# Altium PCB Mirror_PCB1.PcbDoc (part 2 of 2)
Units mm, origin at the board's own origin, x right, y up, seen from the top; angles counter-clockwise.
Board outline 98.5 x 98 mm, 2 copper layers (Top Layer, Bottom Layer), stack 0.187 mm thick; 46 components, 20 nets, 175 pads, 239 vias.
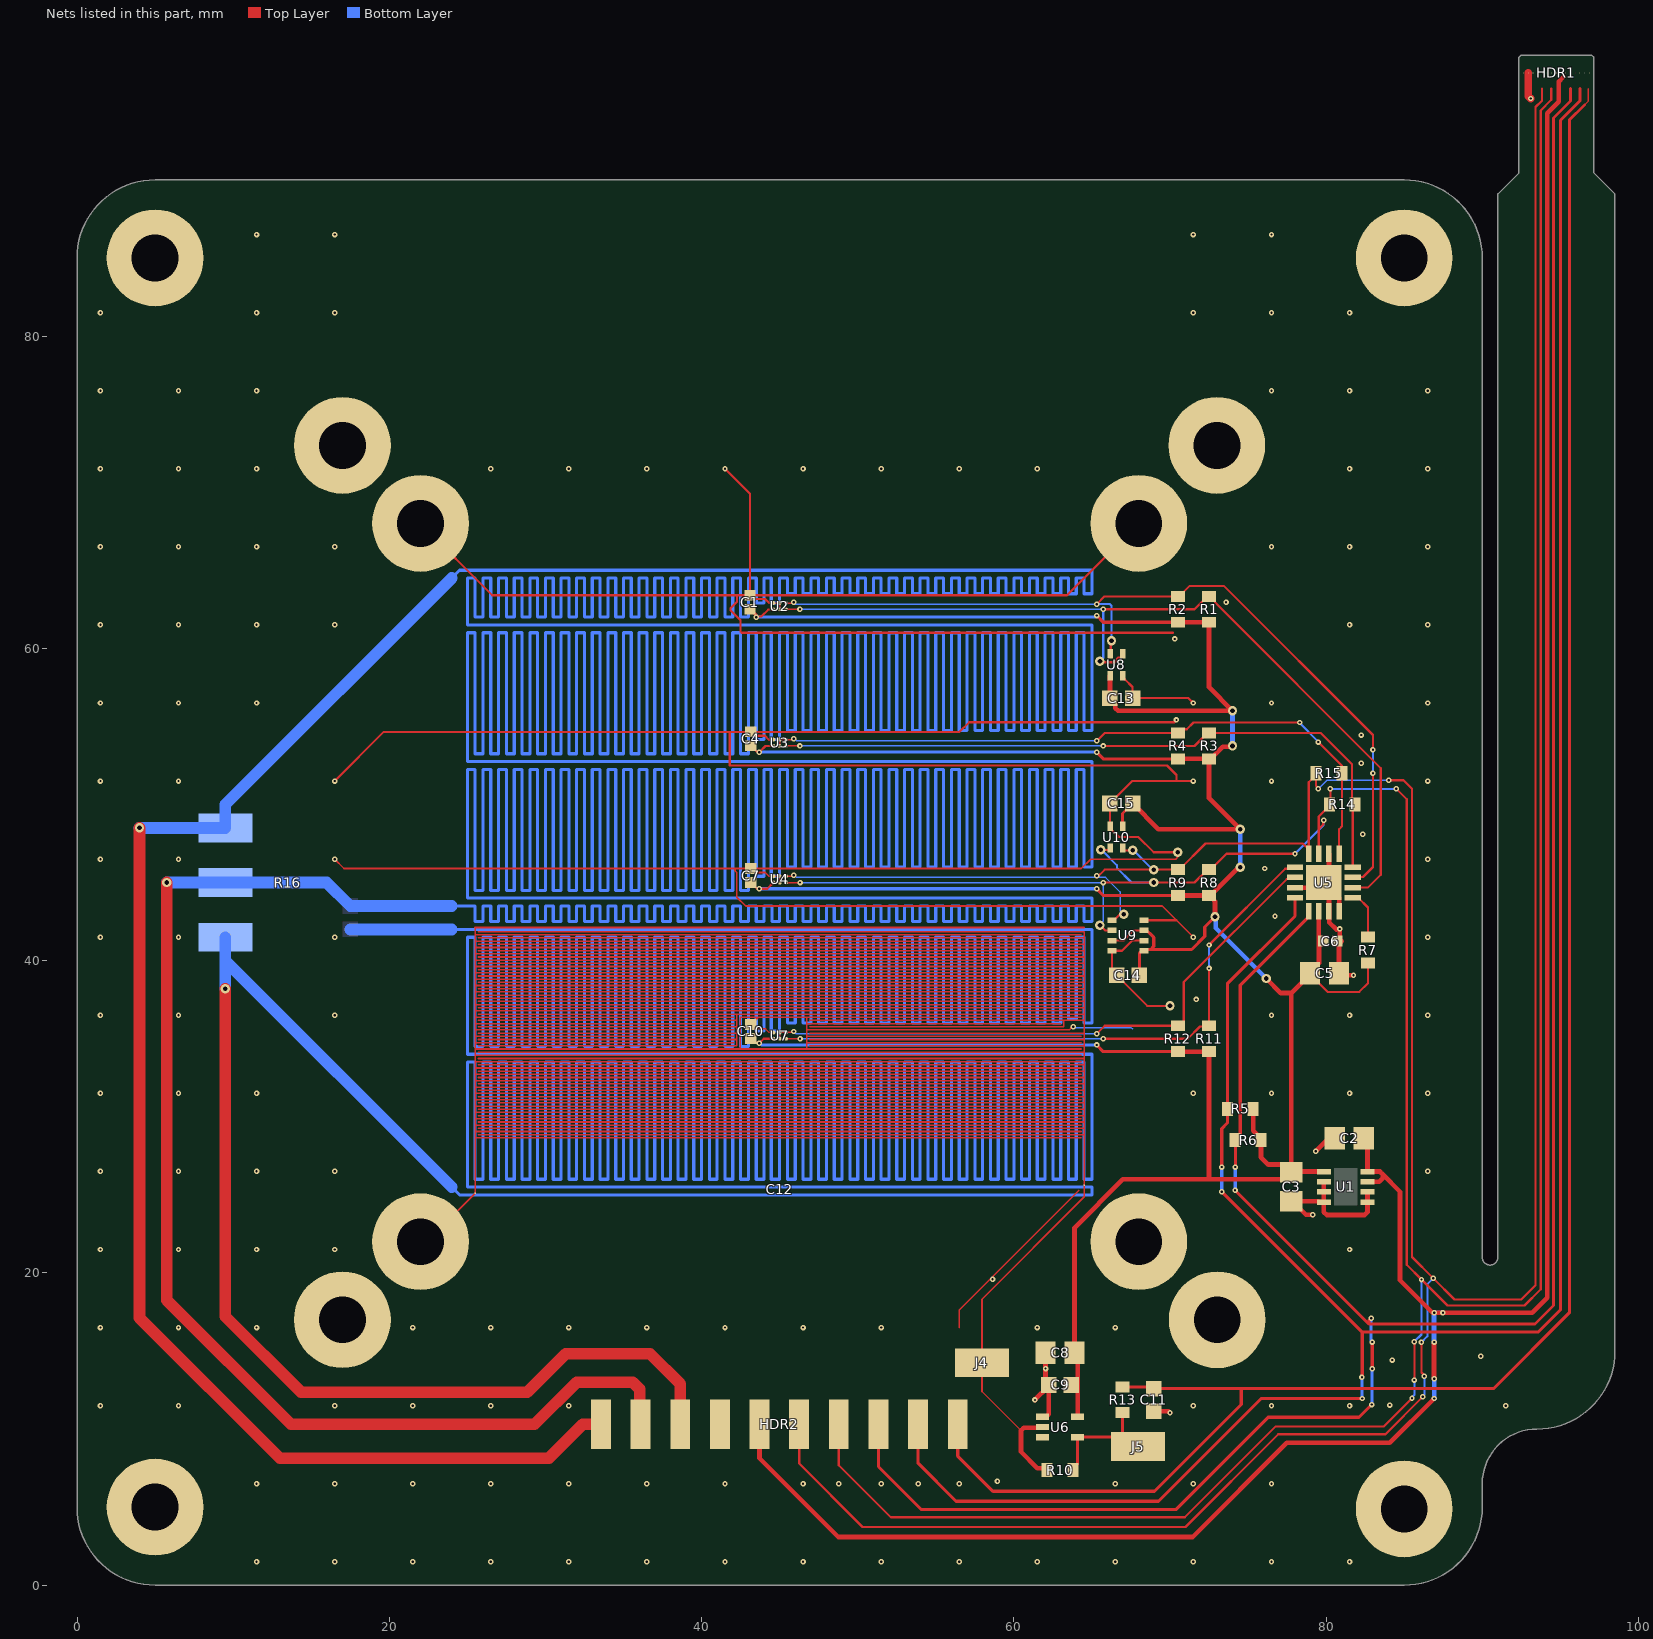
[diagram p2: the nets of this part, all layers, seen from the top]

## Part data
C1 C4 C6 C7 C10: library part CC0402KRX7R9BB103, "CAP 10nF SM0402 X7R 50V YAGEO CC2", Manufacturer=Yageo, Manufacturer Part Number=CC0603KRX7R9BB103, Package=0603, Supplier Part Number 1=3369167, Tolerance (%)=10, Voltage Rating (Volts)=50, Category=Capacitor, ComponentLink1Description="Manufacturer Website", ComponentLink1URL=http://www.yageo.com, Supplier 1=Farnell, Supplier 2=Mouser, Supplier 3=DigiKey, Supplier Part Number 2=603-CC402KRX7R9BB103, Supplier Part Number 3=311-1349-1-ND
C2 C3 C5 C8: library part CC0805KKX7R8BB105, "CAP 1uF SM0805 X7R 25V YAGEO CC2", Manufacturer=Yageo, Package=0805, Supplier Part Number 1=1458903, Tolerance (%)=10, Voltage Rating (Volts)=25, Category=Capacitor, ComponentLink1Description="Manufacturer Website", ComponentLink1URL=http://www.yageo.com, Manufacturer Part Number=CC0805KKX7R8BB105, Supplier 1=Farnell, Supplier 2=Digikey, Supplier 3=Mouser, Supplier 4="Future Electronics", Supplier 5="Arrow Electronics", Supplier 6=Rs, Supplier 7=Digikey, Supplier Part Number 2=311-1456-1-ND, Supplier Part Number 3=603-CC805KKX7R8BB105, Supplier Part Number 4=7716954, Supplier Part Number 5=CC0805KKX7R8BB105, Supplier Part Number 6=1988104, Supplier Part Number 7=311-1456-6-ND
C9 C11: library part CC0603KRX7R9BB103, "CAP 10nF SM0603 X7R 50V YAGEO CC2", Manufacturer=Yageo, Package=0603, Supplier Part Number 1=722236, Tolerance (%)=10, Voltage Rating (Volts)=50, Category=Capacitor, ComponentLink1Description="Manufacturer Website", ComponentLink1URL=http://www.yageo.com, Manufacturer Part Number=CC0603KRX7R9BB103, Supplier 1=Farnell, Supplier 2=DigiKey, Supplier 3="Future Electronics", Supplier 4="Arrow Electronics", Supplier 5=Rs, Supplier 6=Digikey, Supplier 7=Digikey, Supplier 8=Mouser, Supplier Part Number 2=311-1085-1-ND, Supplier Part Number 3=4131256, Supplier Part Number 4=CC0603KRX7R9BB103, Supplier Part Number 5=6169537, Supplier Part Number 6=311-1085-1-ND, Supplier Part Number 7=311-1085-6-ND, Supplier Part Number 8=603-CC603KRX7R9BB103
C13 C14 C15: library part CC0603KRX7R9BB104, "CAP 100nF SM0603 X7R 50V YAGEO CC2", Manufacturer=Yageo, Package=0603, Supplier Part Number 1=603-CC603KRX7R9BB104, Tolerance (%)=10, Voltage Rating (Volts)=50, Category=Capacitor, ComponentLink1Description="Manufacturer Website", ComponentLink1URL=http://www.yageo.com, Manufacturer Part Number=CC0603KRX7R9BB104, Supplier 1=Mouser, Supplier 2="Future Electronics", Supplier 3="Future Electronics", Supplier 4="Arrow Electronics", Supplier 5=Rs, Supplier 6=Avnet, Supplier 7=Digikey, Supplier 8=Digikey, Supplier Part Number 2=3035896, Supplier Part Number 3=9017302, Supplier Part Number 4=CC0603KRX7R9BB104, Supplier Part Number 5=6698767, Supplier Part Number 6=68R4788, Supplier Part Number 7=311-1344-1-ND, Supplier Part Number 8=311-1344-6-ND
HDR1: library part FPC_Contacts_15_DualRow
HDR2: "SURFACE MOUNT (2.54 mm) .100\" PITCH .025\" SQ POST HEADER", Supplier Part Number 1=200-TSM12001TSH, Supplier 1=Mouser, Supplier 2=Digikey, Supplier Part Number 2=TSM-120-01-T-SH-ND
J4 J5: "S1751-46 SMT TestPoint 3.25x1.65", Supplier Part Number 1=1613604, Supplier 1=Rs, Supplier 2=Rs, Supplier 3=Digikey, Supplier 4=Mouser, Supplier Part Number 2=1613705, Supplier Part Number 3=952-3024-ND, Supplier Part Number 4=855-S1751-46
R1 R2 R3 R4 R5 R6 R8 R9 R11 R12: library part RC0603FR-073K3L, "RES 3K3 SM0603 YAGEO RC_L", Manufacturer=Yageo, Manufacturer Part Number=RC0603FR-0710KL, Package=0603, Power (Watts)=0.1, Resistance (Ohms)=10000, Supplier Part Number 1=1995564, Tolerance (%)=1, Category=Resistor, ComponentLink1Description="Manufacturer Website", ComponentLink1URL=http://www.yageo.com, Supplier 1=Rs, Supplier 2=Farnell, Supplier 3=Digikey, Supplier 4=Digikey, Supplier 5=Mouser, Supplier 6=Newark, Supplier Part Number 2=9238549, Supplier Part Number 3=311-3.30KHRCT-ND, Supplier Part Number 4=311-3.30KHRDKR-ND, Supplier Part Number 5=603-RC0603FR-073K3L, Supplier Part Number 6=98K7393
R7 R10 R13: library part RC0603FR-0710KL, "RES 10K SM0603 YAGEO RC_L", Manufacturer=Yageo, Package=0603, Power (Watts)=0.1, Resistance (Ohms)=10000, Supplier Part Number 1=9238603, Tolerance (%)=1, Category=Resistor, ComponentLink1Description="Manufacturer Website", ComponentLink1URL=http://www.yageo.com, Manufacturer Part Number=RC0603FR-0710KL, Supplier 1=Farnell, Supplier 2="Future Electronics", Supplier 3=Rs, Supplier 4=Digikey, Supplier 5=Digikey, Supplier 6=Mouser, Supplier 7=Newark, Supplier Part Number 2=3349388, Supplier Part Number 3=1995443, Supplier Part Number 4=311-10.0KHRCT-ND, Supplier Part Number 5=311-10.0KHRDKR-ND, Supplier Part Number 6=603-RC0603FR-0710KL, Supplier Part Number 7=98K7338
R14 R15: library part RC0603FR-070RL, "RES 0R SM0603 YAGEO RC_L", Manufacturer=Yageo, Manufacturer Part Number=RC0603FR-0710KL, Package=0603, Power (Watts)=0.1, Resistance (Ohms)=10000, Supplier Part Number 1=311-0.0HRCT-ND, Tolerance (%)=1, Category=Resistor, ComponentLink1Description="Manufacturer Website", ComponentLink1URL=http://www.yageo.com, Supplier 1=Digikey, Supplier 2=Digikey, Supplier 3=Farnell, Supplier 4=Mouser, Supplier 5=Newark, Supplier Part Number 2=311-0.0HRDKR-ND, Supplier Part Number 3=2309106, Supplier Part Number 4=603-RC0603FR-070RL, Supplier Part Number 5=50Y7761
U1: library part TPS78433QWDRBRQ1, "TPS78433-Q1 3.3V, 300-mA, High-PSRR Low-Dropout Voltage Regulator With High Accuracy and Enable,  8-SON (3x3)", Supplier Part Number 1=595-TPS78433QWDRBRQ1, Supplier 1=Mouser, Supplier 2=Digikey, Supplier 3="Texas Instruments", Supplier 4=Digikey, Supplier 5=Digikey, Supplier 6=LCSC, Supplier Part Number 2=296-TPS78433QWDRBRQ1CT-ND, Supplier Part Number 3=TPS78433QWDRBRQ1, Supplier Part Number 4=296-TPS78433QWDRBRQ1DKR-ND, Supplier Part Number 5=296-TPS78433QWDRBRQ1TR-ND, Supplier Part Number 6=C3747465
U2 U3 U4 U7: library part AS6221-AWLT-S, "AS6221 Temperature Sensor Digital -40°C ~ 125°C 16b 6-WLCSP (1.5x1.03)", Supplier Part Number 1=985-AS6221-AWLT-S, Supplier 1=Mouser, Supplier 2=Digikey, Supplier 3="Arrow Electronics", Supplier 4="Future Electronics", Supplier 5=Digikey, Supplier 6=Digikey, Supplier 7=Avnet, Supplier Part Number 2=4991-AS6221-AWLT-SCT-ND, Supplier Part Number 3=AS6221-AWLT-S, Supplier Part Number 4=1136541, Supplier Part Number 5=4991-AS6221-AWLT-SDKR-ND, Supplier Part Number 6=4991-AS6221-AWLT-STR-ND, Supplier Part Number 7=Q65114A1149
U5: "4-Channel I2C And SMBus Switch With Reset Functions", Manufacturer_Name="Texas Instruments", Mouser Part Number=595-PCA9546ARGVR, Datasheet Link=http://www.ti.com/lit/gpn/pca9546a, Geometry.Height=1mm, Manufacturer_Part_Number=PCA9546ARGVR, Mouser Price/Stock=https://www.mouser.co.uk/ProductDetail/Texas-Instruments/PCA9546ARGVR?qs=iSMark9AYDVOIxSBd0ujBA%3D%3D, Supplier 1=Mouser, Supplier 2=Digi-Key, Supplier 3=Digi-Key, Supplier Part Number 1=595-PCA9546ARGVR, Supplier Part Number 2=296-21771-1-ND, Supplier Part Number 3=296-21771-6-ND
U6: "SN74LVC1G14 Single Schmitt-Trigger Inverter 1.65-V to 5.5-V VCC +-24mA Output Current (DBV, DCK, DRL, DRY, DPW, and YZP Package)", Supplier Part Number 1=595-SN74LVC1G14DCKR, Supplier 1=Mouser, Supplier 2=Digikey, Supplier 3=Digikey, Supplier 4=LCSC, Supplier Part Number 2=296-11608-1-ND, Supplier Part Number 3=296-11608-6-ND, Supplier Part Number 4=C35740
U8 U10: "SHT45 4th Gen. High-Accuracy, Ultra-Low-Power, 16-bit, Relative Humidity and Temperature Sensor", Supplier Part Number 1=1649-SHT45-AD1F-R2CT-ND, Supplier 1=Digikey, Supplier 2=Digikey, Supplier 3=Farnell, Supplier 4=Mouser, Supplier Part Number 2=1649-SHT45-AD1F-R2DKR-ND, Supplier Part Number 3=4134537, Supplier Part Number 4=403-SHT45-AD1F-R2
U9: "BME280 Digital humidity, pressure and temperature sensor", Supplier Part Number 1=2053946, Supplier 1="Future Electronics", Supplier 2=LCSC, Supplier Part Number 2=C92489

## Free pads (board coordinates)
  round 6.2 hole 3: M1(5,5) M1(5,85) M1(17,17) M1(17,73) M1(22,22) M1(22,68) M1(68,22) M1(68,68) M1(73,73) M1(73.025,16.996) M1(85,4.884) M1(85,85)

## Via types
v1: diameter 0.35, hole 0.15, Top Layer to Bottom Layer, tented both sides, 219 vias
v2: diameter 0.6, hole 0.3, Top Layer to Bottom Layer, tented both sides, 19 vias
v3: diameter 0.35, hole 0.15, Top Layer to Bottom Layer, 1 vias

## Nets (pads, with @x,y where several pads share a name; then routed paths per layer and width w, separated by ;. In a path a pad name is that pad's centre, name@x,y a point inside that pad or via, vN(x,y) a via of type N, cw(c..) or ccw(c..) an arc to the next point about the centre after c; other vN are vias at no path point)
3V3: C1.1 C3.1 C4.1 C5.1 C6.1 C7.1 C8.1 C9.1 C10.1 C13.1 C14.1 C15.1 R1.2 R2.2 R3.2 R4.2 R5.1 R6.1 R7.1 R8.2 R9.2 R11.2 R12.2 U1.1 U2.B1 U3.B1 U4.B1 U5.14 U6.5 U7.B1 U8.3 U9.2 U9.6 U9.8 U10.3 | length 250.6
  Top Layer w0.14: C10.1@43.146,35.011 43.416,34.741 43.599,34.741 43.636,34.704 43.636,34.659 v1(43.696,34.719) 43.977,35 U7.B1@44.607,35 ; C7.1@43.146,45 43.166,45 43.526,44.64 43.656,44.64 v1(43.696,44.6) 44.207,44.6 U4.B1@44.607,45 ; C4.1@43.146,53.75 43.166,53.75 43.526,53.39 43.656,53.39 v1(43.696,53.35) 44.096,53.75 U3.B1@44.6,53.75 ; v1(43.5,62) 43.54,62.04 43.83,62.04 44.269,62.479 44.579,62.479 U2.B1@44.6,62.5 ; U9.2@66.283,41.287 67.035,41.287 67.685,41.937 U9.6@68.333,41.937 ; C5.1@78.969,39.121 80.089,38 82.128,38 82.678,38.549 R7.1@82.678,39.847
  Top Layer w0.2: C1.1@43.1,62.5 43.12,62.5 43.471,62.149 43.471,62.029 v1(43.5,62) ; v1@65.3,34.6 65.727,34.173 R12.2@70.5,34.173 ; v1@65.3,44.6 65.727,44.173 R9.2@70.5,44.173 ; v1(65.3,53.35) 65.727,52.923 R4.2@70.5,52.923 ; v1(65.3,62.1) 65.727,61.673 R2.2@70.5,61.673 ; U10.3@66.963,48.612 66.963,49.425 C15.1@67.603,50.066 ; C14.1@68.035,39.058 68.035,40.464 68.208,40.637 U9.8@68.333,40.637 68.408,40.712 68.756,40.712 ; U9.6@68.333,41.937 68.408,41.862 68.587,41.862 68.737,41.712 68.959,41.49 68.959,40.915 68.756,40.712 ; v2(72.88,42.8) 72.23,42.15 72.23,41.557 71.385,40.712 68.756,40.712
  Top Layer w0.3: U6.5@64.084,10.781 64.084,14.678 C8.1@63.886,14.876 63.886,22.9 66.986,26 72.462,26 ; U8.3@66.163,58.251 66.163,56.824 C13.1@66.149,56.81 66.499,56.46 66.499,56.176 66.675,56 v2(74,56) 72.5,57.5 R1.2@72.5,61.673 R2.2@70.5,61.673 ; C15.1@67.603,50.066 69.261,48.408 v2(74.5,48.408) 72.5,50.408 R3.2@72.5,52.923 ; R12.2@70.5,34.173 R11.2@72.5,34.173 72.5,26.038 72.462,26 ; R9.2@70.5,44.173 R8.2@72.5,44.173 R8.2@72.6,44.173 ; R4.2@70.5,52.923 R3.2@72.5,52.923 ; v2(72.88,42.8) 72.88,43.793 72.8,43.873 72.8,43.973 R8.2@72.6,44.173 ; v2(74,53.75) 73.943,53.693 73.37,53.693 72.6,52.923 R3.2@72.5,52.923 ; v2(74.5,45.975) 74.49,45.965 74.392,45.965 R8.2@72.6,44.173 ; R5.1@75.327,30.5 75.327,29.1 75.827,28.6 75.827,27.4 76.286,26.941 77.271,26.941 C3.1@77.771,26.441 ; v2(76.172,38.855) 77.104,37.924 77.771,37.924 ; U5.14@79.531,43.15 79.531,41.264 79.545,41.25 79.545,39.847 78.969,39.271 C5.1@78.969,39.196 78.969,39.121 77.771,37.924 ; U1.1@79.856,26.489 77.819,26.489 C3.1@77.771,26.441 ; 72.462,26 77.33,26 C3.1@77.771,26.441 ; C3.1@77.771,26.441 77.771,37.924
  Bottom Layer w0.2: v1(43.5,62) 65.159,62 65.259,62.1 v1(65.3,62.1) ; v1(43.696,34.719) 43.736,34.719 43.855,34.6 v1(65.307,34.6) ; v1(43.696,44.6) v1(65.307,44.6) ; v1(43.696,53.35) v1(65.3,53.35) ; v2(74,56) 74,55.959 v2@74.05,55.909
  Bottom Layer w0.3: v2(72.88,42.8) 72.937,42.743 72.937,42.09 v2(76.172,38.855) ; v2(74,53.75) 74,55.861 74.048,55.909 v2@74.05,55.909 ; v2(74.5,45.975) v2(74.5,48.408)
GND: C1.2 C2.2 C3.2 C4.2 C5.2 C6.2 C7.2 C8.2 C9.2 C10.2 C11.2 C12.1 C13.2 C14.2 C15.2 HDR1.13 HDR1.14 HDR1.15 HDR2.7 pad.M1 U1.2 U1.3 U1.4 U1.5 U1.6 U2.A1 U2.A2 U2.B2 U3.A1 U4.A1 U4.A2 U4.B2 U5.6 U5.11 U5.15 U5.16 U5.17 U6.1 U6.3 U7.A1 U8.4 U9.1 U9.5 U9.7 U10.4 | length 354.4
  Top Layer w0.102: v1(16.5,46.5) 17.1,45.9 42.203,45.9 ; pad.M1@22,22 22.406,22 C12.1@25.502,25.095 ; 43.7,36.373 43.627,36.373 43.166,35.911 C10.2@43.146,35.911 43.432,35.625 44.093,35.625 44.318,35.4 U7.A1@44.607,35.4 ; U2.A1@44.6,62.9 U2.A2@45,62.9 U2.B2@45,62.5 ; U4.B2@45.007,45 U4.A2@45.007,45.4 U4.A1@44.607,45.4 44.602,45.405 44.313,45.405 44.073,45.645 43.401,45.645 C7.2@43.146,45.9 ; 56.5,16.5 56.5,17.631 64.153,25.284 ; v2(70.5,46.935) 70.5,46.638 70.362,46.5 64.922,46.5 64.322,45.9 C7.2@43.146,45.9 ; v1(71.5,41.5) 70.413,42.587 69.5,43.5 42.821,43.5 42.262,44.06 42.262,45.638 42.144,45.756 42.144,45.84 42.203,45.9 ; 42.203,45.9 C7.2@43.146,45.9
  Top Layer w0.14: v1(16.5,51.5) 19.65,54.65 41.8,54.65 ; pad.M1@22,68 26.6,63.4 42.262,63.4 ; v1(41.5,71.5) 43.1,69.9 C1.2@43.1,63.4 ; U3.A1@44.6,54.15 44.311,54.15 44.064,54.398 43.398,54.398 C4.2@43.146,54.65 ; U2.A1@44.6,62.9 44.325,62.9 44.061,63.164 43.336,63.164 C1.2@43.1,63.4 ; U8.4@66.963,58.251 66.963,58.126 67.068,58.021 67.102,58.021 67.603,57.52 C13.2@67.603,56.81 71.19,56.81 v1(71.5,56.5) ; pad.M1@68,68 63.4,63.4 C1.2@43.1,63.4 ; U9.7@68.333,41.287 67.58,41.287 66.93,40.637 U9.1@66.283,40.637 66.283,39.356 C14.2@66.581,39.058 68.538,37.101 v2(70,37.101) ; U9.5@68.333,42.587 70.413,42.587 ; 70.2,61 42.568,61 42.486,61.082 42.486,61.814 41.858,62.442 41.858,62.558 42.262,62.962 42.262,63.4 ; 70.27,55.27 57.134,55.27 56.514,54.65 C4.2@43.146,54.65 ; v2(70.5,46.935) 68.952,46.935 67.975,47.912 66.738,47.912 66.163,48.487 U10.4@66.163,48.612 66.163,50.053 C15.2@66.149,50.066 67.583,51.5 70.422,51.5 ; v1(71.5,51.5) 70.422,51.5 ; 41.8,54.65 C4.2@43.146,54.65 ; 41.8,54.65 41.8,52.5 69.812,52.5 70.422,51.89 70.422,51.5 ; 42.262,63.4 C1.2@43.1,63.4
  Top Layer w0.3: v1(61.35,11.862) C9.2@62.232,12.744 ; U6.1@61.834,10.781 62.059,10.781 62.232,10.954 C9.2@62.232,12.744 ; C8.2@62.032,14.876 v1(62.032,13.876) 62.032,13.022 C9.2@62.232,12.822 C9.2@62.232,12.744 ; C11.2@68.959,11.135 69.901,11.135 69.986,11.049 v1(70,11.049) ; C3.2@77.771,24.587 C3.2@77.846,24.587 ; U5.11@78.006,44.675 79.531,44.675 U5.17@79.856,45 U5.17@80.181,44.675 ; v1(79.146,23.714) 79.136,23.724 78.71,23.724 C3.2@77.846,24.587 ; v1(79.331,27.796) 80.153,28.619 C2.2@80.547,28.619 ; U1.2@79.856,25.839 U1.3@79.856,25.189 U1.4@79.856,24.539 ; U5.6@80.181,46.85 U5.17@80.181,44.675 ; 80.649,41.998 80.206,42.441 80.206,43.125 U5.15@80.181,43.15 U5.17@80.181,44.675 ; U5.16@80.831,43.15 80.831,44.025 U5.17@80.181,44.675 ; v1(80.872,42.03) 80.872,41.377 80.999,41.25 80.823,41.074 C5.2@80.823,39.196 80.95,39.069 v1(81.753,39.069) ; U1.6@82.646,25.189 U1.5@82.646,24.539 82.646,23.89 82.47,23.714 80.031,23.714 79.856,23.89 U1.4@79.856,24.539 ; C3.2@77.846,24.587 79.533,24.587 79.581,24.539 U1.4@79.856,24.539
  Top Layer w0.5: HDR1.14@92.95,96.85 92.95,95.364 v1(93.1,95.214)
  Bottom Layer w0.102: v3(63.805,35.763) ccw(c63.877,35.763) 63.877,35.691 67.53,35.691 67.597,35.625
  other v1: 11.5,1.5 16.5,1.5 21.5,1.5 26.5,1.5 31.5,1.5 36.5,1.5 41.5,1.5 46.5,1.5 51.5,1.5 56.5,1.5 61.5,1.5 66.5,1.5 71.5,1.5 76.5,1.5 81.5,1.5 11.5,6.5 16.5,6.5 21.5,6.5 26.5,6.5 31.5,6.5 36.5,6.5 41.5,6.5 46.5,6.5 48.79,6.5 51.5,6.5 53.87,6.5 56.5,6.5 66.5,6.5 71.5,6.5 76.5,6.5 58.95,6.656 1.5,11.5 6.5,11.5 16.5,11.5 21.5,11.5 26.5,11.5 31.5,11.5 71.5,11.5 76.5,11.5 81.5,11.5 91.5,11.5 84.077,11.539 84.235,14.418 89.899,14.672 1.5,16.5 6.5,16.5 11.5,16.5 21.5,16.5 26.5,16.5 31.5,16.5 36.5,16.5 41.5,16.5 46.5,16.5 51.5,16.5 61.5,16.5 66.5,16.5 58.634,19.595 1.5,21.5 6.5,21.5 11.5,21.5 16.5,21.5 81.5,21.5 1.5,26.5 6.5,26.5 11.5,26.5 16.5,26.5 86.5,26.5 1.5,31.5 6.5,31.5 11.5,31.5 71.5,31.5 76.5,31.5 81.5,31.5 86.5,31.5 1.5,36.5 6.5,36.5 16.5,36.5 76.5,36.5 81.5,36.5 86.5,36.5 71.688,37.512 1.5,41.5 6.5,41.5 16.5,41.5 86.5,41.5 76.726,42.85 76.062,45.9 1.5,46.5 6.5,46.5 86.5,46.5 82.347,48.095 1.5,51.5 6.5,51.5 76.5,51.5 86.5,51.5 82.255,52.637 82.255,54.447 70.413,55.413 1.5,56.5 6.5,56.5 11.5,56.5 76.5,56.5 86.5,56.5 70.3,60.6 1.5,61.5 6.5,61.5 11.5,61.5 16.5,61.5 81.5,61.5 86.5,61.5 73.588,62.95 1.5,66.5 6.5,66.5 11.5,66.5 16.5,66.5 76.5,66.5 81.5,66.5 86.5,66.5 1.5,71.5 6.5,71.5 11.5,71.5 26.5,71.5 31.5,71.5 36.5,71.5 46.5,71.5 51.5,71.5 56.5,71.5 61.5,71.5 81.5,71.5 86.5,71.5 1.5,76.5 6.5,76.5 11.5,76.5 76.5,76.5 81.5,76.5 86.5,76.5 1.5,81.5 11.5,81.5 16.5,81.5 71.5,81.5 76.5,81.5 81.5,81.5 11.5,86.5 16.5,86.5 71.5,86.5 76.5,86.5
HEAT_HI: HDR2.10 R16.1 | length 71
  Top Layer w0.75: v2(4,48.5) 4,17.132 13,8.132 30.222,8.132 32.39,10.3 HDR2.10@33.55,10.3
  Bottom Layer w0.75: v2(4,48.5) R16.1@9.5,48.5
HEAT_LO: HDR2.8 R16.3 | length 59.8
  Top Layer w0.75: v2(9.5,38.202) 9.5,17.208 14.349,12.359 28.838,12.359 31.302,14.822 36.698,14.822 38.63,12.89 HDR2.8@38.63,10.3
  Bottom Layer w0.75: v2(9.5,38.202) 9.5,40 R16.3@9.5,41.5
HEAT_MI: HDR2.9 R16.2 | length 67.6
  Top Layer w0.75: v2(5.757,45) 5.757,18.246 13.703,10.3 29.3,10.3 32,13 35.595,13 36.035,12.561 36.035,10.355 HDR2.9@36.09,10.3
  Bottom Layer w0.75: v2(5.757,45) R16.2@9.5,45
NetC12_2: C12.2 J4.1 R10.2 U6.2 | length 24.5
  Top Layer w0.102: 60.458,9.905 57.959,12.404 57.959,14.822 57.959,18.315 64.516,24.872 C12.2@64.516,25.621
  Top Layer w0.3: U6.2@61.834,10.131 61.784,10.081 60.634,10.081 60.458,9.905 60.458,8.548 61.507,7.499 62.008,7.499 R10.2@62.132,7.376
NetJ5_1: J5.1 R10.1 R13.2 U6.4 | length 8
  Top Layer w0.2: R10.1@63.786,7.376 63.786,7.476 64.084,7.774 U6.4@64.084,9.481 J5.1@67.179,9.481 ; R13.2@66.959,11.049 66.959,9.701 J5.1@67.179,9.481 ; J5.1@67.959,8.876 67.784,8.876 J5.1@67.179,9.481
NetR1_1: R1.1 U2.B3 U5.2 U8.1 | length 57.3
  Top Layer w0.102: U2.B3@45.4,62.5 v1(46.3,62.5)
  Top Layer w0.14: v2(65.513,59.169) 65.573,59.109 66.486,59.109 66.568,59.191 66.568,59.303 66.687,59.421 66.858,59.421 66.963,59.526 U8.1@66.963,59.651 ; v1(65.727,62.5) 71.573,62.5 72.4,63.327 R1.1@72.5,63.327 72.6,63.327 72.88,63.047 72.88,62.947 83.5,52.327 83.5,45.5 82.675,44.675 U5.2@81.706,44.675
  Bottom Layer w0.102: v1(46.3,62.5) v1(65.727,62.5)
  Bottom Layer w0.14: v2(65.513,59.169) 65.727,59.384 v1(65.727,62.5)
NetR2_1: R2.1 U2.A3 U5.3 U8.2 | length 56.3
  Top Layer w0.102: U2.A3@45.4,62.9 45.766,62.9 45.827,62.961 v1(45.894,62.961)
  Top Layer w0.14: v1(65.3,62.827) 65.8,63.327 R2.1@70.5,63.327 70.6,63.327 71.273,64 73.447,64 83,54.447 v1(83,53.5) ; U8.2@66.163,59.651 66.208,59.697 66.208,60.431 v2(66.254,60.477) ; U5.3@81.706,45.325 81.739,45.359 82.359,45.359 83,46 v1(83,52)
  Bottom Layer w0.102: v1(45.894,62.961) 46.029,62.827 v1(65.3,62.827)
  Bottom Layer w0.14: v1(65.3,62.827) 65.319,62.847 66.127,62.847 66.254,62.719 v2(66.254,60.477) ; v1(83,52) v1(83,53.5)
NetR3_1: R3.1 R14.2 U3.B3 U5.4 | length 44.2
  Top Layer w0.102: U3.B3@45.4,53.75 v1(46.3,53.75)
  Top Layer w0.14: v1(65.727,53.75) 71.573,53.75 72.4,54.577 R3.1@72.5,54.577 79.662,54.577 81.662,52.576 81.662,50.197 R14.2@81.86,50 81.706,49.846 U5.4@81.706,45.975
  Bottom Layer w0.102: v1(46.3,53.75) v1(65.727,53.75)
NetR4_1: R4.1 R15.2 U3.A2 U3.A3 U3.B2 U5.5 | length 43.9
  Top Layer w0.102: U3.B2@45,53.75 U3.A2@45,54.15 U3.A3@45.4,54.15 45.766,54.15 45.827,54.211 v1(45.894,54.211)
  Top Layer w0.14: v1@65.313,54.064 65.826,54.577 R4.1@70.5,54.577 70.745,54.822 71.072,54.822 71.5,55.25 v1(78.3,55.25) ; v1@79.504,54.004 81.008,52.5 R15.2@81.008,52 81.008,48.585 80.831,48.408 U5.5@80.831,46.85
  Bottom Layer w0.102: v1(45.894,54.211) 45.944,54.211 46.078,54.077 v1(65.3,54.077)
  Bottom Layer w0.14: v1(78.3,55.25) 78.3,55.225 79.5,54.025 v1(79.5,54)
NetR7_2: R7.2 U5.1 | length 3.1
  Top Layer w0.14: U5.1@81.706,44.025 82.056,44.025 82.678,43.403 R7.2@82.678,41.501
NetR11_1: R11.1 U5.9 U7.B3 | length 40.2
  Top Layer w0.102: U7.B3@45.407,35 v1(46.307,35)
  Top Layer w0.14: v1@65.727,35 71.143,35 71.922,35.779 72.452,35.779 R11.1@72.5,35.827 v1(72.5,39.5) ; v1(72.5,41) 77.382,45.882 77.912,45.882 U5.9@78.006,45.975
  Bottom Layer w0.102: v1(46.307,35) v1(65.734,35)
  Bottom Layer w0.14: v1(72.5,39.5) v1(72.5,41)
NetR12_1: R12.1 U5.10 U7.A2 U7.A3 U7.B2 | length 39.1
  Top Layer w0.102: U7.B2@45.007,35 U7.A2@45.007,35.4 U7.A3@45.407,35.4 45.773,35.4 45.834,35.461 v1(45.901,35.461)
  Top Layer w0.14: v1@65.312,35.322 65.817,35.827 R12.1@70.5,35.827 70.6,35.827 70.88,36.107 70.88,38.63 77.47,45.22 77.901,45.22 U5.10@78.006,45.325
  Bottom Layer w0.102: v1(45.901,35.461) 46.035,35.327 v1(65.307,35.327)
OSC_OUT: C11.1 HDR1.1 HDR2.1 R13.1 | length 134
  Top Layer w0.102: 96.544,94.802 96.799,95.057 96.799,95.824
  Top Layer w0.2: HDR2.1@56.41,10.3 56.41,8.265 58.659,6.016 69.005,6.016 74.564,11.574 74.564,12.589 ; R13.1@66.959,12.703 68.844,12.703 C11.1@68.959,12.589 74.564,12.589 ; 96.544,94.802 95.581,93.838 95.581,17.452 90.718,12.589 74.564,12.589
SCL_MAIN: HDR1.3 HDR2.2 R5.2 U5.12 | length 164.4
  Top Layer w0.2: HDR2.2@53.87,10.3 53.87,7.802 56.296,5.376 69.261,5.376 75.841,11.956 v1(82.314,11.956) ; v1(73.312,25.207) 82.314,16.205 ; v1(73.312,26.781) 73.312,29.239 73.673,29.6 R5.2@73.673,30.5 73.673,38.517 78.006,42.85 U5.12@78.006,44.025 ; v1(82.296,13.307) 82.314,13.325 82.314,16.205 ; 96.25,95.85 96.25,95.052 95.012,93.814 95.012,17.644 93.573,16.205 82.314,16.205
  Bottom Layer w0.2: v1(73.312,25.207) v1(73.312,26.781) ; v1(82.296,13.307) 82.305,13.298 82.305,11.965 v1(82.314,11.956)
SCL_SEC: HDR1.11 HDR2.5 R9.1 R15.1 U4.A3 U5.8 U9.4 U10.2 | length 226.2
  Top Layer w0.102: U4.A3@45.407,45.4 45.773,45.4 45.834,45.461 v1(45.901,45.461)
  Top Layer w0.14: HDR2.5@46.25,10.3 46.25,7.79 50.31,3.73 70.993,3.73 76.932,9.669 83.803,9.669 v1(86.194,12.06) ; v1@65.312,45.322 65.817,45.827 v2(68.959,45.827) R9.1@70.5,45.827 70.6,45.827 72.273,47.5 78.5,47.5 78.695,47.305 78.776,47.305 U5.8@78.881,47.2 ; U9.4@66.283,42.587 66.408,42.587 66.743,42.922 66.995,42.922 v2(67.035,42.962) ; U10.2@66.963,47.212 66.963,47.167 67.068,47.062 v2(67.613,47.062) ; U5.8@78.881,46.85 U5.8@78.881,47.2 ; R15.1@79.354,52 R15.1@79.354,51.9 ; v1(79.504,51) 79.504,51.057 79.354,51.207 R15.1@79.354,51.9 ; v1(84,51.55) 84.95,51.55 85.5,51 85.5,21.02 v1(86.863,19.657) 88.226,18.294 92.487,18.294 93.41,19.217 93.41,94.667 93.82,95.077 93.82,95.85 ; v1(86.103,15.561) 86.103,13.628 86.294,13.436 v1(86.294,13.379) ; U5.8@78.881,47.2 78.881,51.427 R15.1@79.354,51.9
  Bottom Layer w0.102: v1(45.901,45.461) 45.951,45.461 46.085,45.327 v1@65.307,45.327 ; v1(65.307,45.427) v1@65.307,45.327 ; v2@67.035,42.963 66.804,43.194 66.804,44.393 65.869,45.327 v1@65.307,45.327 ; v1(79.504,51) 80.054,51.55 v1(84,51.55)
  Bottom Layer w0.14: v2(67.613,47.062) 67.668,47.062 68.903,45.827 v2(68.959,45.827) ; v1(86.103,15.561) 86.483,15.941 86.483,19.277 v1(86.863,19.657) ; v1(86.194,12.06) 86.194,12.127 86.294,12.227 v1(86.294,13.379)
SDA_MAIN: HDR1.5 HDR2.3 R6.2 U5.13 | length 166.8
  Top Layer w0.2: HDR2.3@51.33,10.3 51.33,7.596 54.09,4.836 70.369,4.836 76.285,10.753 82.104,10.753 v1(82.921,11.57) ; v1(74.168,25.297) 82.734,16.73 ; R6.2@74.167,28.506 74.5,28.839 74.5,38.419 78.881,42.8 U5.13@78.881,43.15 ; R6.2@74.173,28.5 74.186,28.487 v1(74.186,26.781) ; v1(82.883,17.091) 82.734,16.942 82.734,16.73 ; v1(82.951,13.864) v1(82.951,15.571) ; 95.65,95.85 95.65,95.052 94.565,93.967 94.565,17.915 93.38,16.73 82.734,16.73
  Bottom Layer w0.102: v1(74.168,25.297) v1@74.177,25.306 ; v1@74.177,26.771 v1(74.186,26.781)
  Bottom Layer w0.2: v1@74.177,25.306 v1@74.177,26.771 ; v1(82.883,17.091) 82.883,15.679 82.951,15.612 v1(82.951,15.571) ; v1(82.921,11.57) 82.936,11.585 82.936,13.849 v1(82.951,13.864)
SDA_SEC: HDR1.9 HDR2.4 R8.1 R14.1 U4.B3 U5.7 U9.3 U10.1 | length 224.2
  Top Layer w0.102: U4.B3@45.407,45 v1(46.307,45)
  Top Layer w0.14: HDR2.4@48.79,10.3 48.79,7.682 52.124,4.347 70.948,4.347 76.771,10.17 83.705,10.17 v1(85.5,11.965) ; v2(65.513,42.26) 65.835,41.937 U9.3@66.283,41.937 ; v2(65.561,47.093) 66.058,47.093 66.163,47.198 U10.1@66.163,47.212 ; v1@65.727,45 v1(65.734,45) v2(68.959,45) 71.573,45 72.4,45.827 R8.1@72.5,45.827 72.6,45.827 73.623,46.85 v1(78.006,46.85) ; U5.7@79.531,46.85 79.531,48.428 ; v1(79.856,49) 79.815,48.96 79.815,48.713 79.531,48.428 ; v1(80.272,51) 80.272,50.066 R14.1@80.206,50 80.206,49.9 79.531,49.225 79.531,48.428 ; v1(84.5,51) 85.164,50.336 85.164,20.519 v1(86.108,19.575) 87.771,17.912 92.698,17.912 93.741,18.955 93.741,94.447 94.42,95.127 94.42,95.85 ; v1(85.653,13.136) v1(85.653,15.601)
  Bottom Layer w0.102: v1(46.307,45) 65.672,45 v1(65.734,45) 65.734,42.538 65.513,42.317 v2(65.513,42.26)
  Bottom Layer w0.14: v2(65.561,47.093) 65.608,47.093 66.599,46.103 66.599,45.941 67.54,45 v2(68.959,45) ; v1(78.006,46.85) 79.815,48.66 79.815,48.96 v1(79.856,49) ; v1(80.272,51) v1(84.5,51) ; v1(85.5,11.965) 85.5,12.022 85.653,12.175 v1(85.653,13.136) ; v1(85.653,15.601) 86.108,16.057 v1(86.108,19.575)
VIN: C2.1 HDR1.6 HDR1.7 HDR1.8 HDR2.6 U1.7 U1.8 | length 158.4
  Top Layer w0.3: HDR2.6@43.71,10.3 43.71,8.126 48.75,3.087 71.456,3.087 77.489,9.12 84.077,9.12 v1(86.913,11.956) ; C2.1@82.401,28.619 82.646,28.374 U1.8@82.646,26.489 83.448,26.489 83.624,26.314 ; U1.7@82.646,25.839 83.398,25.839 83.624,26.065 83.624,26.314 ; v1(86.913,15.571) 86.913,13.223 v1(86.915,13.222) ; 95.201,96.6 94.9,96.299 94.9,95.006 94.153,94.258 94.153,18.404 93.201,17.452 v1(87.48,17.452) 86.913,17.452 86.901,17.465 86.807,17.465 84.731,19.541 84.731,25.207 83.624,26.314
  Bottom Layer w0.2: v1(86.913,17.455) v1@86.915,17.453 ; v1@87.478,17.453 v1(87.48,17.452)
  Bottom Layer w0.3: v1(86.913,15.571) v1(86.913,17.455) ; v1(86.913,11.956) v1(86.915,13.222) ; v1@86.915,17.453 v1@87.478,17.453
pads on no net: HDR1.2 HDR1.4 HDR1.10 HDR1.12 R16. U1.9

## Polygon pours and split planes (outlines as drawn)
GND on Top Layer "GND_L01_P005" (solid, pour order 5): 0,0 0,98 98.5,98 98.5,0
GND on Top Layer "GND_L01_P002" (solid, pour order 2): 25.5,64.425 25.5,42 64.5,42 64.5,64.425
no net on Layer0 "Default Coverlay 1 Top" (split plane): 0,5 0,4.672 0.086,4.022 0.255,3.389 0.506,2.784 0.834,2.216 1.233,1.696 1.696,1.233 2.216,0.834 2.784,0.506 3.389,0.255 4.022,0.086 4.672,0 5,0 85,0 85.328,0 85.978,0.086 86.611,0.255 87.216,0.506 87.784,0.834 88.304,1.233 88.767,1.696 89.166,2.216 89.494,2.784 89.745,3.389 89.914,4.022 90,4.672 90,5 90,6.5 90.007,6.729 90.067,7.183 90.186,7.625 90.361,8.048 90.59,8.444 90.869,8.808 91.192,9.131 91.556,9.41 91.952,9.639 92.375,9.814 92.817,9.933 93.271,9.993 93.5,10 93.828,10 94.478,10.086 95.111,10.255 95.716,10.506 96.284,10.834 96.804,11.233 97.267,11.696 97.666,12.216 97.994,12.784 98.245,13.389 98.414,14.022 98.5,14.672 98.5,15 98.5,89.1 97.15,90.45 97.15,97.85 97,98 92.5,98 92.35,97.85 92.35,90.45 91,89.1 91,21 90.99,20.902 90.916,20.722 90.778,20.584 90.598,20.51 90.5,20.5 90.402,20.51 90.222,20.584 90.084,20.722 90.01,20.902 90,21 90,85 90,85.328 89.914,85.978 89.745,86.611 89.494,87.216 89.166,87.784 88.767,88.304 88.304,88.767 87.784,89.166 87.216,89.494 86.611,89.745 85.978,89.914 85.328,90 85,90 5,90 4.672,90 4.022,89.914 3.389,89.745 2.784,89.494 2.216,89.166 1.696,88.767 1.233,88.304 0.834,87.784 0.506,87.216 0.255,86.611 0.086,85.978 0,85.328 0,85
no net on Layer0 "Default Coverlay 1 Bottom" (split plane): 0,5 0,4.672 0.086,4.022 0.255,3.389 0.506,2.784 0.834,2.216 1.233,1.696 1.696,1.233 2.216,0.834 2.784,0.506 3.389,0.255 4.022,0.086 4.672,0 5,0 85,0 85.328,0 85.978,0.086 86.611,0.255 87.216,0.506 87.784,0.834 88.304,1.233 88.767,1.696 89.166,2.216 89.494,2.784 89.745,3.389 89.914,4.022 90,4.672 90,5 90,6.5 90.007,6.729 90.067,7.183 90.186,7.625 90.361,8.048 90.59,8.444 90.869,8.808 91.192,9.131 91.556,9.41 91.952,9.639 92.375,9.814 92.817,9.933 93.271,9.993 93.5,10 93.828,10 94.478,10.086 95.111,10.255 95.716,10.506 96.284,10.834 96.804,11.233 97.267,11.696 97.666,12.216 97.994,12.784 98.245,13.389 98.414,14.022 98.5,14.672 98.5,15 98.5,89.1 97.15,90.45 97.15,97.85 97,98 92.5,98 92.35,97.85 92.35,90.45 91,89.1 91,21 90.99,20.902 90.916,20.722 90.778,20.584 90.598,20.51 90.5,20.5 90.402,20.51 90.222,20.584 90.084,20.722 90.01,20.902 90,21 90,85 90,85.328 89.914,85.978 89.745,86.611 89.494,87.216 89.166,87.784 88.767,88.304 88.304,88.767 87.784,89.166 87.216,89.494 86.611,89.745 85.978,89.914 85.328,90 85,90 5,90 4.672,90 4.022,89.914 3.389,89.745 2.784,89.494 2.216,89.166 1.696,88.767 1.233,88.304 0.834,87.784 0.506,87.216 0.255,86.611 0.086,85.978 0,85.328 0,85
no net on Board Layer Stack Top Coverlay "NONET_L-01_P-001" (solid): 25.5,64.425 64.5,64.425 64.5,25.5 25.5,25.5
GND on Bottom Layer "GND_L02_P004" (solid, remove dead copper, pour order 4): 0,0.043 0,98 98.5,98 98.5,0.043

## Other copper
Top Layer:
  pour cut-out: 70,70 70,20 64.5,20 64.5,70
  pour cut-out: 20,70 70,70 70,64.5 20,64.5
  pour cut-out: 20,25.095 70,25.095 70,19.595 20,19.595
  pour cut-out: 20,20 20,70 25.5,70 25.5,20
Bottom Layer:
  pour cut-out: 56.296,16.5 ccw(c56.296,16.193) 55.989,16.193 55.989,7.087 ccw(c56.411,7.087) 56.411,6.676 60.634,6.676 60.634,6.672 60.686,6.672 ccw(c60.686,7.087) 61.102,7.087 61.102,16.152 ccw(c60.754,16.152) 60.754,16.5 60.634,16.5
  pour cut-out: 22.5,67.5 22.5,22.5 67.5,22.5 67.5,67.5

## Silkscreen, mask and mechanical layers (free items; w line width, h text height)
Board Layer Stack Top Coverlay:
  pour cut-out: 43.796,34.525 44.373,34.525 44.373,36.319 43.796,36.319
  pour cut-out: 45.621,34.515 46.199,34.515 46.199,36.309 45.621,36.309
  pour cut-out: 43.796,44.407 44.373,44.407 44.373,46.2 43.796,46.2
  pour cut-out: 45.621,44.397 46.199,44.397 46.199,46.19 45.621,46.19
  pour cut-out: 43.796,53.157 44.373,53.157 44.373,54.95 43.796,54.95
  pour cut-out: 45.621,53.147 46.199,53.147 46.199,54.94 45.621,54.94
  pour cut-out: 45.626,61.797 46.203,61.797 46.203,63.59 45.626,63.59
  pour cut-out: 43.8,61.807 44.378,61.807 44.378,63.6 43.8,63.6
Board:
  lines w0.01: 0,5 ccw(c5,5) 5,0 85,0 ccw(c85,5) 90,5 90,6.5 cw(c93.5,6.5) 93.5,10 ccw(c93.5,15) 98.5,15 98.5,89.1 97.15,90.45 97.15,97.85 97,98 95.5,98 92.5,98 92.35,97.85 92.35,90.45 91,89.1 91,21 cw(c90.5,21) 90.5,20.5 cw(c90.5,21) 90,21 90,85 ccw(c85,85) 85,90 5,90 ccw(c5,85) 0,85 0,5
Fab Notes (Mech8):
  lines w0.254: 92.375,90.804 ccw(c92.629,90.804) 92.629,90.55 96.846,90.55 ccw(c96.846,90.804) 97.1,90.804 97.1,97.771 ccw(c96.846,97.771) 96.846,98.025 92.629,98.025 ccw(c92.629,97.771) 92.375,97.771 92.375,90.804
  text "On Bottom: 4.5x7.5 Pi Stiffener (T=0.1) T=0.2 (total)" at 61.425,91.55 h1.52

## Text inside footprints (layer, text, board x,y; h text height)
Credit: Bottom Layer "01 / 2024" at 47.152,85.209 h1.3 r180